# EAGLE board board (EAGLE 7.7.0)
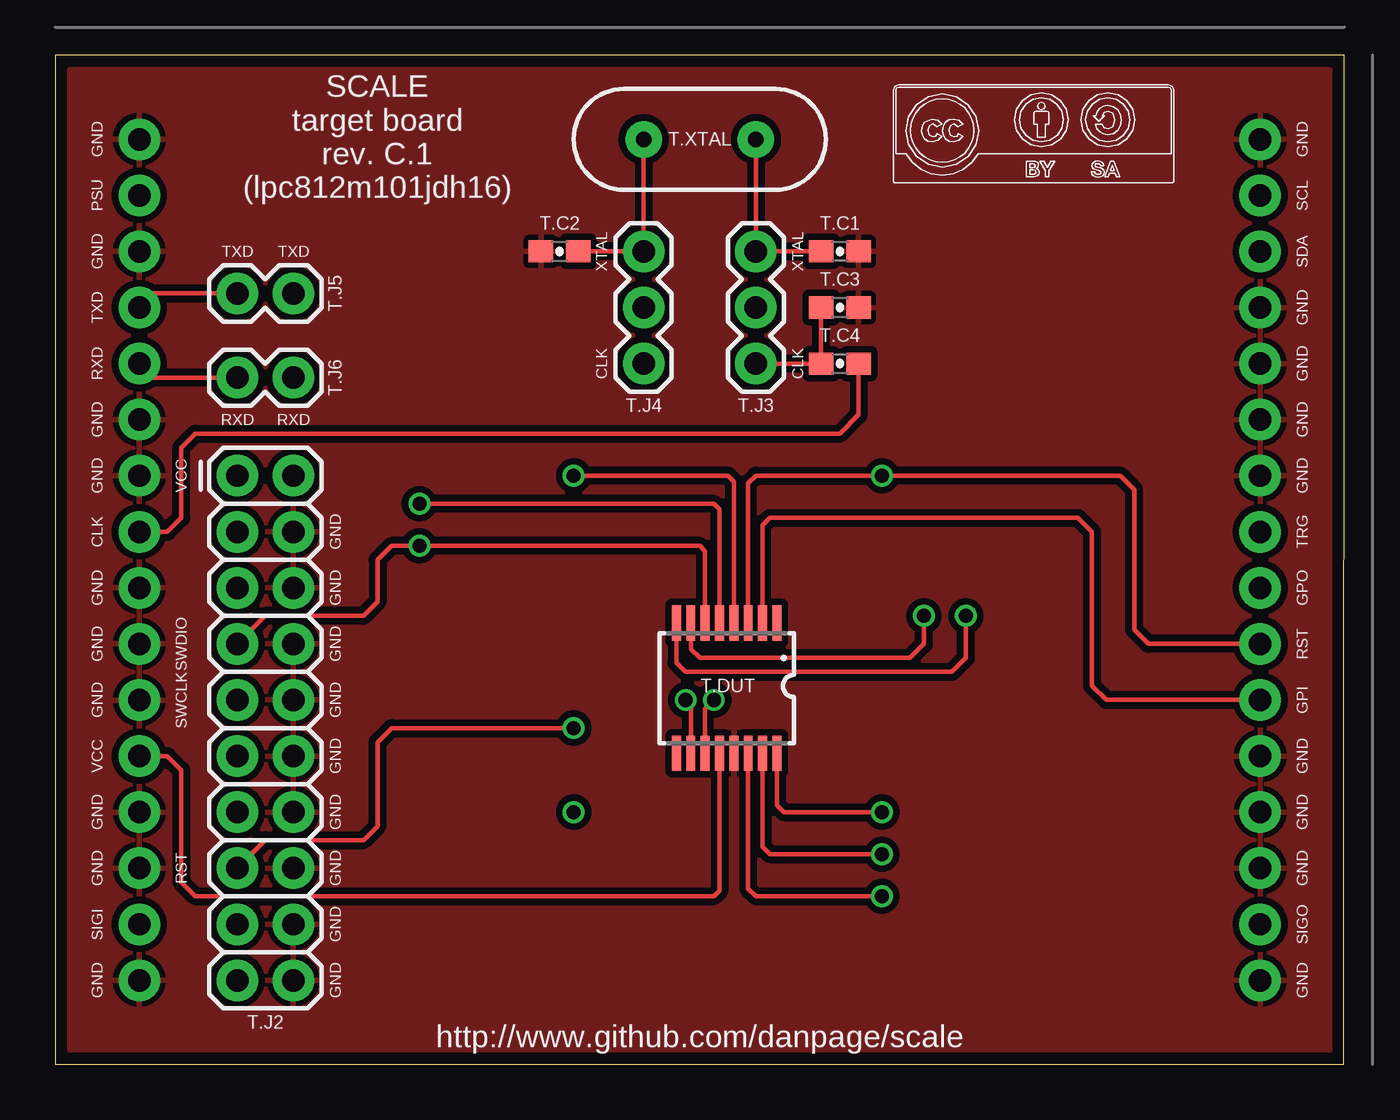
[diagram p0: board, top side]
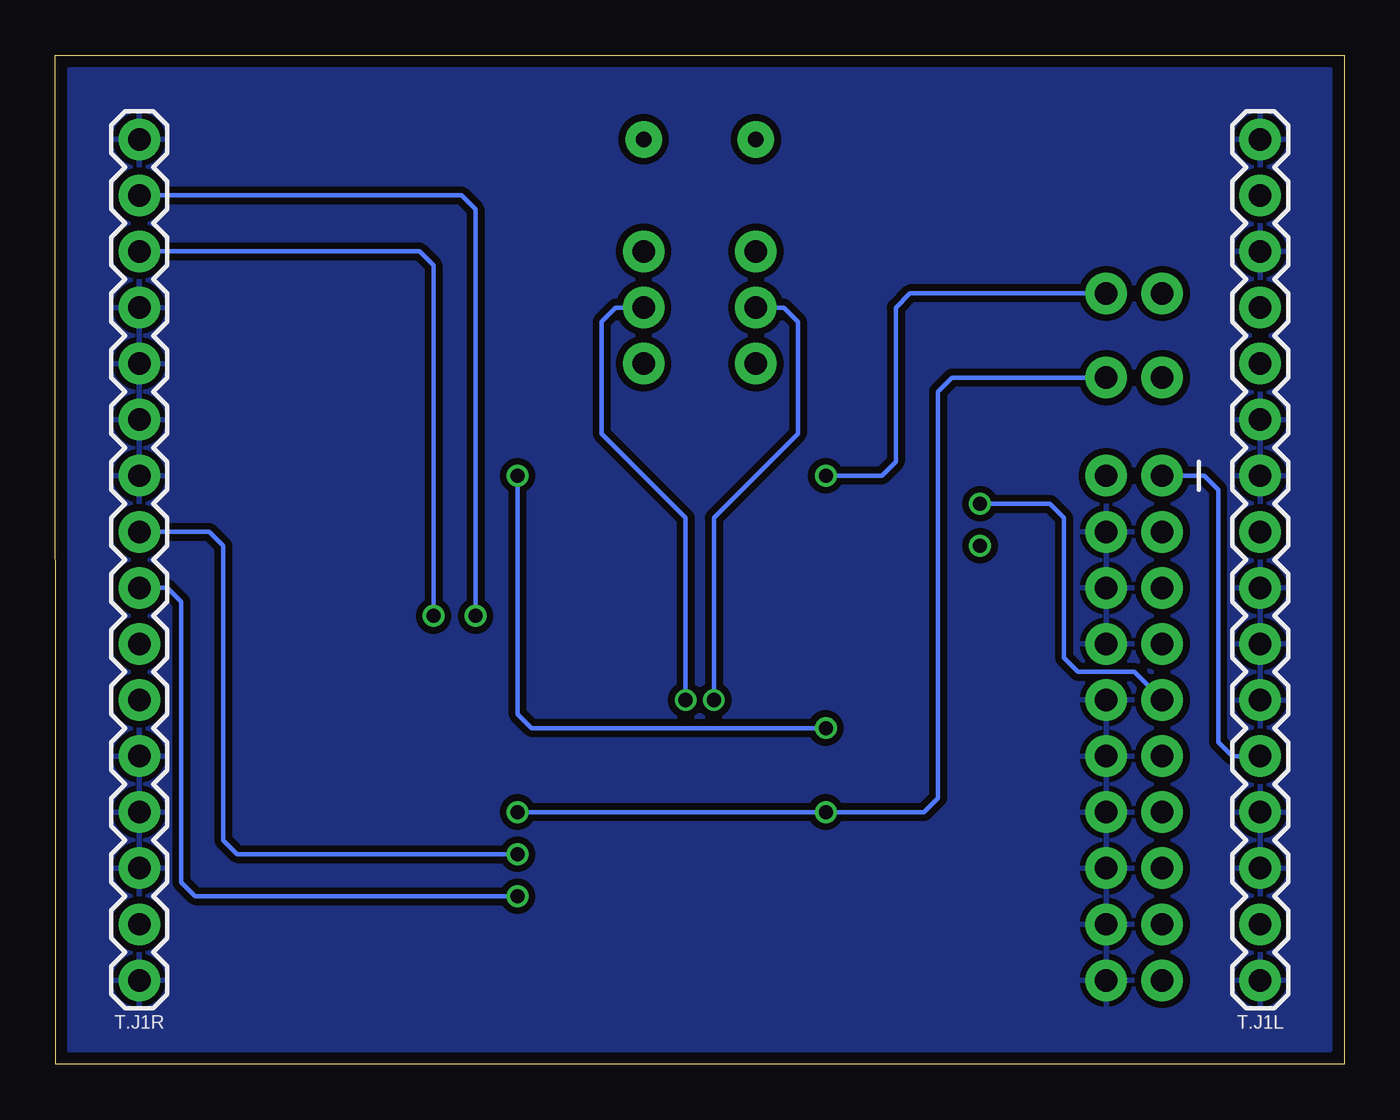
[diagram p1: board, bottom side, seen from below]

Size 58.42 x 45.72 mm. Coordinates in mm from the lower left corner, seen from the top.
Outline: 0,0 58.4,0 58.42,45.72 0,45.72 0,0
Copper layers (1*16): Top 0.0356mm / dielectric 1.5011mm / Bottom 0.0356mm
Design rules "oshpark-2layer": minimum track width 6mil, minimum drill 13mil, track to track 6mil, track to pad 6mil, pad to pad 6mil, via to via 6mil, smd to smd 6mil, copper to edge 15mil, drill to drill 6mil, minimum pad ring 7mil, minimum via ring 7mil, stop-mask expansion 2.5mil, vias tented up to drill 0mil, thermal gap 10mil

## Footprints (pad centres in the part's own frame; a part is rotated, then mirrored left to right if it is on the bottom)
0603-CAP = smd 1.1 x 1: 1 -0.85,0; 2 0.85,0
TSSOP16 = smd 0.4 x 1.6: 1 -2.225,-2.85; 2 -1.575,-2.85; 3 -0.925,-2.85; 4 -0.275,-2.85; 5 0.375,-2.85; 6 1.025,-2.85; 7 1.675,-2.85; 8 2.325,-2.85; 9 2.325,3.05; 10 1.675,3.05; 11 1.025,3.05; 12 0.375,3.05; 13 -0.275,3.05; 14 -0.925,3.05; 15 -1.575,3.05; 16 -2.225,3.05
1X16 = drill 1.016 pad 1.88: 1 0,0; 2 2.54,0; 3 5.08,0; 4 7.62,0; 5 10.16,0; 6 12.7,0; 7 15.24,0; 8 17.78,0; 9 20.32,0; 10 22.86,0; 11 25.4,0; 12 27.94,0; 13 30.48,0; 14 33.02,0; 15 35.56,0; 16 38.1,0
2X10 = drill 1.016 pad 1.88: 1 0,0; 2 0,2.54; 3 2.54,0; 4 2.54,2.54; 5 5.08,0; 6 5.08,2.54; 7 7.62,0; 8 7.62,2.54; 9 10.16,0; 10 10.16,2.54; 11 12.7,0; 12 12.7,2.54; 13 15.24,0; 14 15.24,2.54; 15 17.78,0; 16 17.78,2.54; 17 20.32,0; 18 20.32,2.54; 19 22.86,0; 20 22.86,2.54
1X03 = drill 1.016 pad 1.88: 1 0,0; 2 2.54,0; 3 5.08,0
1X02 = drill 1.016 pad 1.88: 1 0,0; 2 2.54,0
HC49US = drill 0.7 pad 1.651: 1 -2.54,0; 2 2.54,0

## Placement (x,y rotation side)
T.C1  0.018 nF = 18 pF  [0603-CAP]  35.56,36.83 180 top
T.C2  0.018 nF = 18 pF  [0603-CAP]  22.86,36.83 0 top
T.C3  0.3 nF = 300 pF  [0603-CAP]  35.56,34.29 180 top
T.C4  0.1 nF = 100 pF  [0603-CAP]  35.56,31.75 0 top
T.DUT  LPC812M101JDH16  [TSSOP16]  30.48,17.14 180 top
T.J1L  [1X16]  3.81,3.81 90 bottom
T.J1R  [1X16]  54.61,3.81 90 bottom
T.J2  [2X10]  8.26,26.67 270 top
T.J3  [1X03]  31.75,36.83 270 top
T.J4  [1X03]  26.67,36.83 270 top
T.J5  [1X02]  8.26,34.92 0 top
T.J6  [1X02]  8.26,31.11 0 top
T.XTAL  16 Mhz  [HC49US]  29.21,41.91 0 top

## Library data of the parts
T.C1-T.C4 = SparkFun-Capacitors
T.DUT = board
T.J1L T.J1R T.J2-T.J6 = SparkFun-Connectors
T.XTAL = SparkFun-FreqCtrl

## Nets
DUT_CLK: T.C4.2 T.J1L.9
DUT_GPI: T.DUT.2 T.J1R.6
DUT_GPO: T.DUT.14 T.J1R.8
DUT_RST: T.DUT.3 T.J1R.7 T.J2.15
DUT_RXD: T.J1L.12 T.J6.1
DUT_SCL: T.DUT.7 T.J1R.15
DUT_SDA: T.DUT.8 T.J1R.14
DUT_SIGI: T.J1L.2
DUT_SIGO: T.J1R.2
DUT_SWCLK: T.DUT.5 T.J2.9
DUT_SWDIO: T.DUT.6 T.J2.7
DUT_SWO: T.J2.13
DUT_TRG: T.DUT.15 T.J1R.9
DUT_TXD: T.J1L.13 T.J5.1
DUT_VCC: T.DUT.12 T.J1L.5 T.J2.1
DUT_XTAL1: T.DUT.11 T.J3.2
DUT_XTAL2: T.DUT.10 T.J4.2
GND: T.C1.1 T.C2.1 T.C3.1 T.DUT.13 T.J1L.1 T.J1L.3 T.J1L.4 T.J1L.6 T.J1L.7 T.J1L.8 T.J1L.10 T.J1L.11 T.J1L.14 T.J1L.16 T.J1R.1 T.J1R.3 T.J1R.4 T.J1R.5 T.J1R.10 T.J1R.11 T.J1R.12 T.J1R.13 T.J1R.16 T.J2.4 T.J2.6 T.J2.8 T.J2.10 T.J2.12 T.J2.14 T.J2.16 T.J2.18 T.J2.20
N$1: T.C1.2 T.J3.1 T.XTAL.2
N$2: T.C2.2 T.J4.1 T.XTAL.1
N$20: T.C3.2 T.C4.1 T.J3.3
N$27: T.DUT.4 T.J5.2
N$28: T.DUT.16 T.J6.2
PSU: T.J1L.15

## Tracks (layer width: path | path; a pad name or v marks a point on that pad's centre or on a via)
DUT_CLK
  Top 0.203: T.J1L.9 5.08,24.13 5.71,24.77 5.71,27.94 6.35,28.57 35.56,28.57 36.41,29.43 T.C4.2
DUT_GPI
  Top 0.203: T.DUT.2 32.05,24.43 32.38,24.77 46.35,24.77 46.99,24.13 46.99,17.14 47.62,16.51 T.J1R.6
DUT_GPO  (via drill 0.64)
  Top 0.203: T.DUT.14 31.41,7.96 31.75,7.62 v37.47,7.62
  Bottom 0.203: T.J1R.8 53.34,21.59 52.7,20.95 52.7,8.26 52.07,7.62 v37.47,7.62
DUT_RST  (via drill 0.64)
  Top 0.203: T.J2.15 9.53,10.16 13.97,10.16 14.61,10.79 14.61,14.61 15.24,15.24 v23.5,15.24 | T.J1R.7 49.53,19.05 48.9,19.68 48.9,26.04 48.26,26.67 v37.47,26.67 31.75,26.67 31.41,26.32 T.DUT.3
  Bottom 0.203: v23.5,15.24 36.83,15.24 37.47,15.88 v37.47,26.67
DUT_RXD
  Top 0.203: T.J6.1 4.45,31.11 T.J1L.12
DUT_SCL  (via drill 0.64)
  Top 0.203: T.DUT.7 28.8,18.82 29.21,18.41 38.73,18.41 39.37,19.05 v39.37,20.32
  Bottom 0.203: T.J1R.15 40.01,39.37 39.37,38.73 v39.37,20.32
DUT_SDA  (via drill 0.64)
  Top 0.203: T.DUT.8 28.16,18.2 28.57,17.78 40.64,17.78 41.27,18.41 v41.27,20.32
  Bottom 0.203: T.J1R.14 41.91,36.83 41.27,36.2 v41.27,20.32
DUT_SWCLK  (via drill 0.64)
  Top 0.203: T.DUT.5 30.11,25.14 29.84,25.4 v16.51,25.4
  Bottom 0.203: v16.51,25.4 13.34,25.4 12.7,24.77 12.7,18.41 12.06,17.78 9.53,17.78 T.J2.9
DUT_SWDIO  (via drill 0.64)
  Top 0.203: T.DUT.6 29.45,23.25 29.21,23.5 v16.51,23.5 15.24,23.5 14.61,22.86 14.61,20.95 13.97,20.32 9.53,20.32 T.J2.7
DUT_TRG  (via drill 0.64)
  Top 0.203: T.DUT.15 32.05,9.86 32.38,9.53 v37.47,9.53
  Bottom 0.203: T.J1R.9 51.44,24.13 50.8,23.5 50.8,10.16 50.16,9.53 v37.47,9.53
DUT_TXD
  Top 0.203: T.J1L.13 4.45,34.92 T.J5.1
DUT_VCC
  Top 0.203: T.J1L.5 5.08,13.97 5.71,13.34 5.71,8.26 6.35,7.62 29.84,7.62 30.11,7.88 T.DUT.12
  Bottom 0.203: T.J1L.5 5.08,13.97 5.71,14.61 5.71,26.04 6.35,26.67 T.J2.1
DUT_XTAL1  (via drill 0.64)
  Top 0.203: T.DUT.11 29.45,16.12 v29.84,16.51
  Bottom 0.203: T.J3.2 33.02,34.29 33.66,33.66 33.66,28.57 29.84,24.77 v29.84,16.51
DUT_XTAL2  (via drill 0.64)
  Top 0.203: T.DUT.10 28.8,16.28 v28.57,16.51
  Bottom 0.203: T.J4.2 25.4,34.29 24.77,33.66 24.77,28.57 28.57,24.77 v28.57,16.51
GND
  pour Bottom (isolate 0.305): 0.64,0.64 0.64,45.09 57.78,45.09 57.78,0.64
  pour Top (isolate 0.305): 0.64,0.64 0.64,45.09 57.78,45.09 57.78,0.64
N$1
  Top 0.203: T.XTAL.2 T.J3.1 T.C1.2
N$2
  Top 0.203: T.XTAL.1 T.J4.1 T.C2.2
N$20
  Top 0.203: T.J3.3 T.C4.1 T.C3.2
N$27  (via drill 0.64)
  Top 0.203: T.DUT.4 30.75,26.39 30.48,26.67 v23.5,26.67
  Bottom 0.203: T.J5.2 19.68,34.92 20.32,34.29 20.32,27.3 20.95,26.67 v23.5,26.67
N$28  (via drill 0.64)
  Top 0.203: T.DUT.16 32.7,11.74 33.02,11.43 v37.47,11.43
  Bottom 0.203: T.J6.2 17.78,31.11 18.41,30.48 18.41,12.06 19.05,11.43 v23.5,11.43 v37.47,11.43

## Text on the board
tPlace: GND | GND | SCALE / target board / rev. C.1 / (lpc812m101jdh16) | PSU | SCL | GND | TXD | TXD | XTAL | XTAL | SDA | TXD | GND | RXD | CLK | CLK | GND | GND | RXD | RXD | GND | GND | VCC | GND | CLK | GND | TRG | GND | GND | GPO | GND | SWDIO | GND | RST | GND | SWCLK | GND | GPI | VCC | GND | GND | GND | GND | GND | GND | RST | GND | GND | SIGI | GND | SIGO | GND | GND | GND | http://www.github.com/danpage/scale